# EAGLE board bird_beaks (EAGLE 9.6.2)
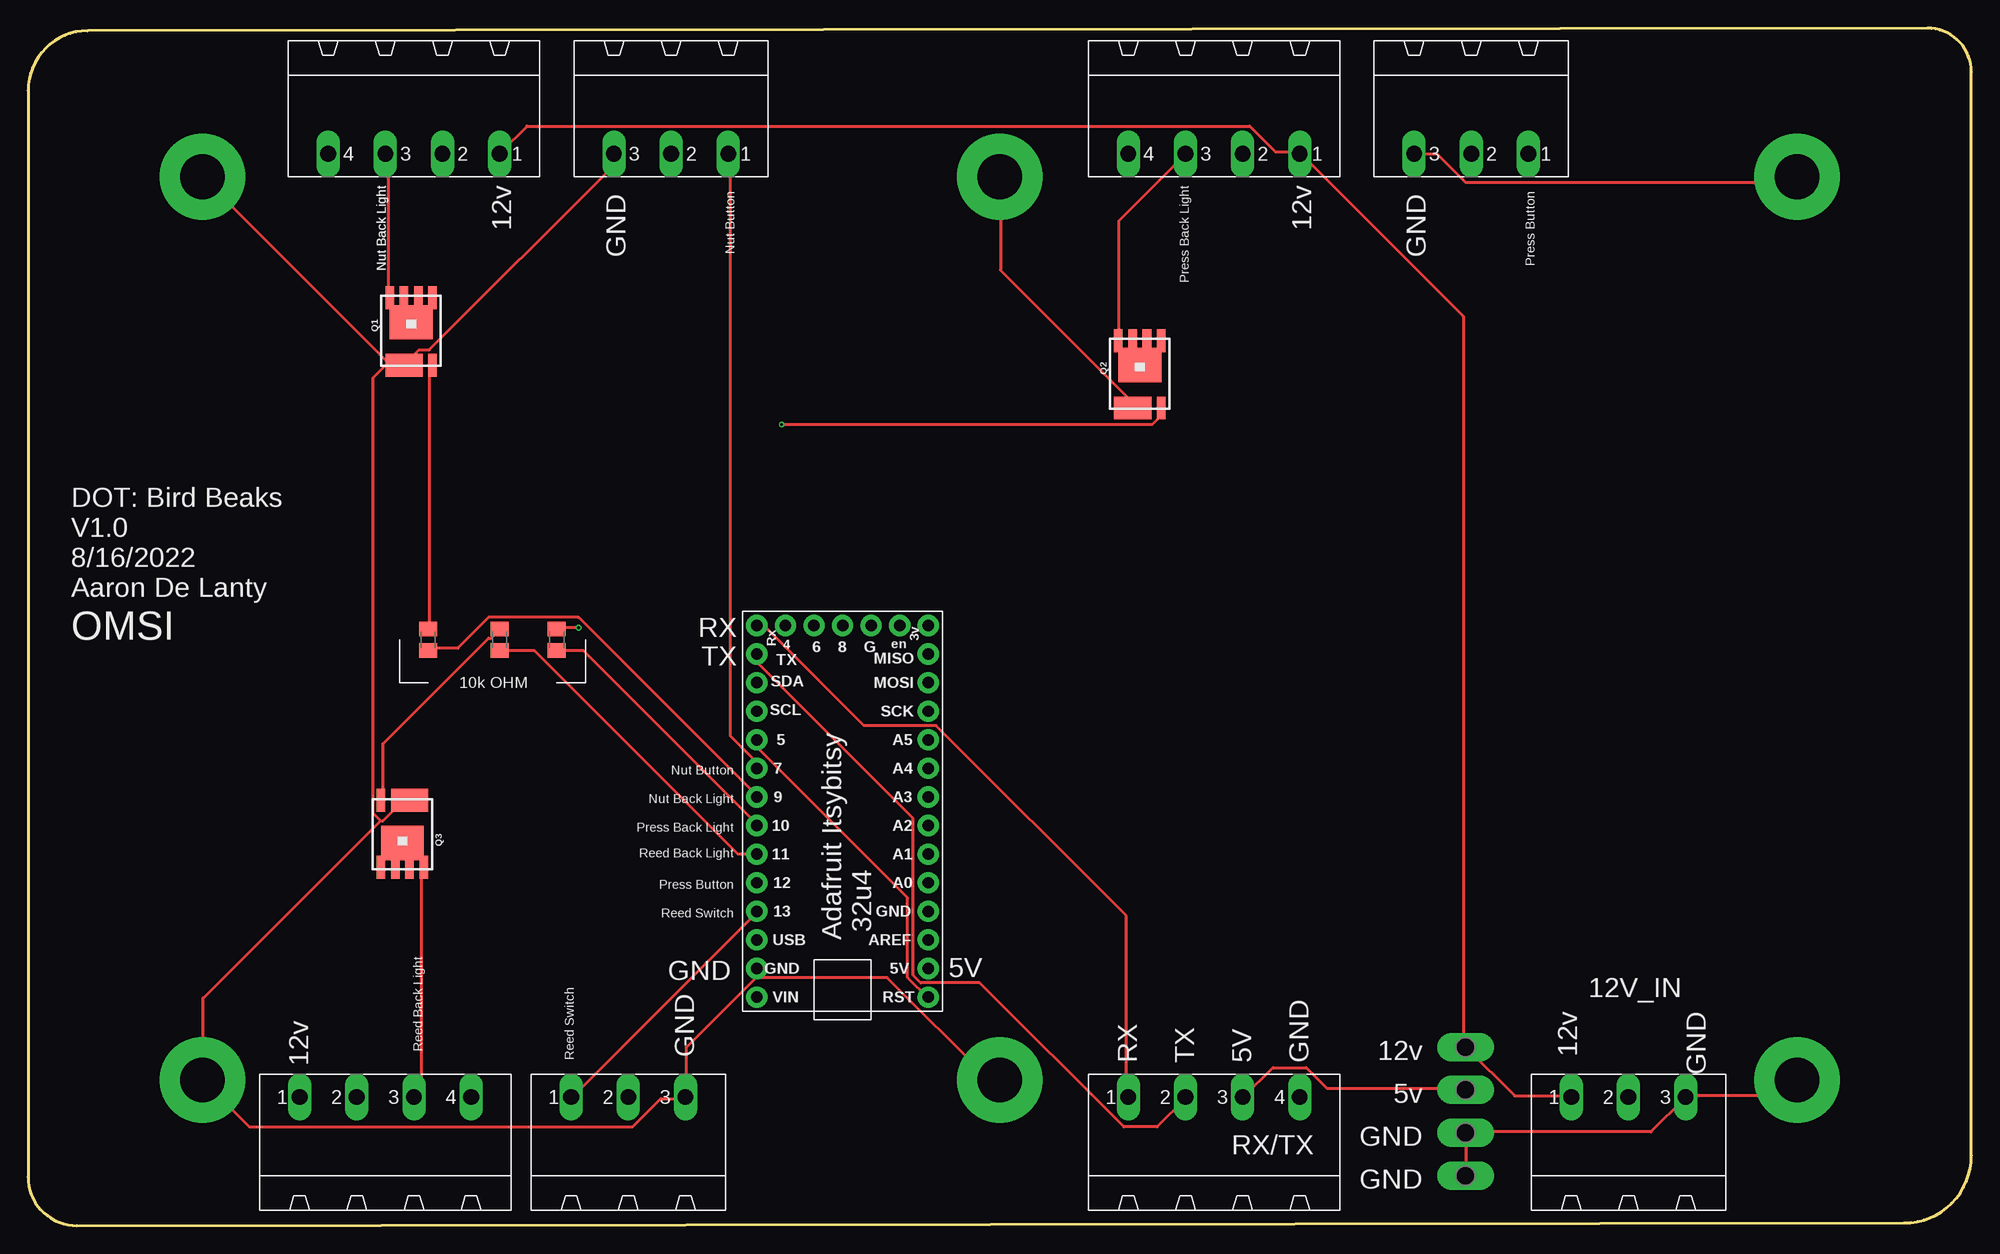
[diagram p0: board, top side]
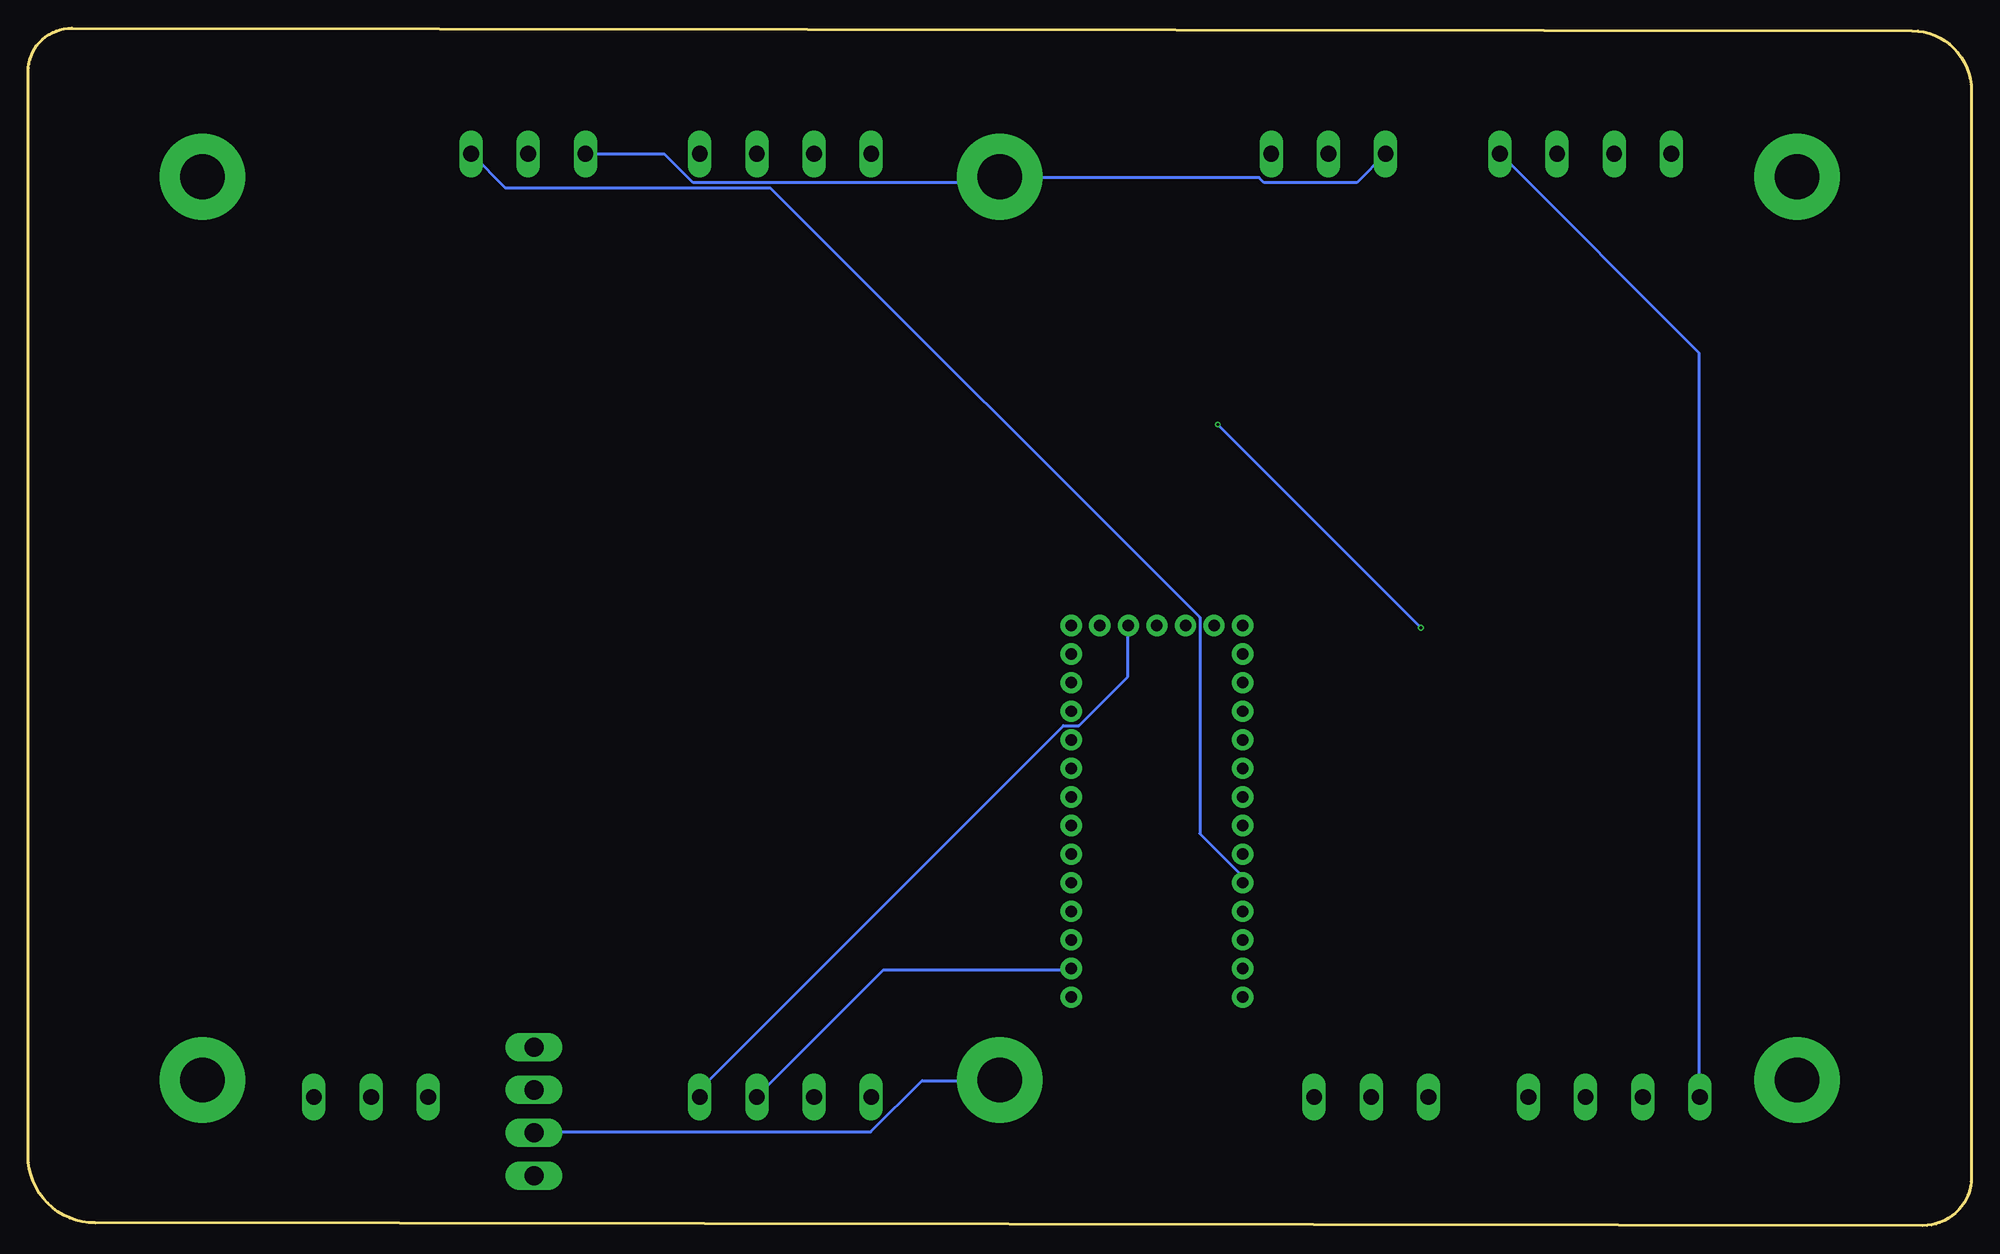
[diagram p1: board, bottom side, seen from below]

Size 172.72 x 106.41 mm. Coordinates in mm from the lower left corner, seen from the top.
Outline: 168.83,106.41 5.28,106.17 arc90 0,100.89 0,4.33 arc90 4.33,0 166.75,0.24 arc90 172.72,6.22 172.72,102.53 arc90 168.83,106.41
Copper layers (1*16): Top 0.035559375mm / dielectric 1.6mm / Bottom 0.035559375mm
Design rules "oshpark-2layer (1) *": minimum track width 10mil, minimum drill 10mil, track to track 8mil, track to pad 8mil, pad to pad 8mil, via to via 8mil, smd to smd 8mil, copper to edge 15mil, drill to drill 6mil, minimum pad ring 5mil, minimum via ring 5mil, stop-mask expansion 2.5mil, vias tented up to drill 25mil, thermal gap 10mil

## Footprints (pad centres in the part's own frame; a part is rotated, then mirrored left to right if it is on the bottom)
M0805 = smd 1.3 x 1.6: 1 -0.95,0; 2 0.95,0
MSTBA3 = drill 1.397 long: 1 -5.08,5.08; 2 0,5.08; 3 5.08,5.08
SO-8_POWER_PAK = smd 0.762 x 2.032: D1 -3.423,2.437; D2 -2.153,2.437; D3 -0.883,2.437; D4 0.387,2.437; G 0.387,-3.532 | smd 3.81 x 3.048: D5 -1.518,0.278 | smd 3.302 x 2.032: S -2.153,-3.532
MSTBA4 = drill 1.397 long: 1 -7.62,5.08; 2 -2.54,5.08; 3 2.54,5.08; 4 7.62,5.08
STANDOFF_ELECTRICAL_5_32 = drill 3.969 pad 7.62: P1 0,0
P2-38-17 = drill 1.702 pad 2.121 long: TP-1 -1.905,0; TP-2 1.905,0
ADAFRUIT_LENOARDO = drill 1.016 pad 1.88: 3V -10.16,-21.59; 5V -10.16,8.89; A0 -10.16,1.27; A1 -10.16,-1.27; A2 -10.16,-3.81; A3 -10.16,-6.35; A4 -10.16,-8.89; A5 -10.16,-11.43; AREF -10.16,6.35; D4 2.54,-21.59; D5 5.08,-11.43; D6 0,-21.59; D7 5.08,-8.89; D8 -2.54,-21.59; D9 5.08,-6.35; D10 5.08,-3.81; D11 5.08,-1.27; D12 5.08,1.27; D13 5.08,3.81; EN -7.62,-21.59; GND@0 -10.16,3.81; GND@1 -5.08,-21.59; GND@2 5.08,8.89; MISO -10.16,-19.05; MOSI -10.16,-16.51; RES -10.16,11.43; RX 5.08,-21.59; SCK -10.16,-13.97; SCL 5.08,-13.97; SDA 5.08,-16.51; TX 5.08,-19.05; USB 5.08,6.35; VIN 5.08,11.43

## Placement (x,y rotation side)
10K  [M0805]  35.56,52.06 270 top
10K1  [M0805]  46.99,52.06 270 top
10K2  [M0805]  41.91,52.06 270 top
12V_IN  MSTBA3  [MSTBA3]  142.24,6.34 0 top
Q1  MOSFET-NCH  [SO-8_POWER_PAK]  35.56,80 0 top
Q2  MOSFET-NCH  [SO-8_POWER_PAK]  100.33,76.19 0 top
Q3  MOSFET-NCH  [SO-8_POWER_PAK]  31.75,34.28 180 top
RX/TX  MSTBA4  [MSTBA4]  105.41,6.34 0 top
S1  STANDOFF_ELECTRICAL5-32  [STANDOFF_ELECTRICAL_5_32]  15.49,93.21 0 top
S2  STANDOFF_ELECTRICAL5-32  [STANDOFF_ELECTRICAL_5_32]  86.36,93.21 0 top
S3  STANDOFF_ELECTRICAL5-32  [STANDOFF_ELECTRICAL_5_32]  157.23,12.95 0 top
S4  STANDOFF_ELECTRICAL5-32  [STANDOFF_ELECTRICAL_5_32]  157.23,93.21 0 top
S6  STANDOFF_ELECTRICAL5-32  [STANDOFF_ELECTRICAL_5_32]  86.36,12.95 0 top
S8  STANDOFF_ELECTRICAL5-32  [STANDOFF_ELECTRICAL_5_32]  15.49,12.95 0 top
TP1  PTR2  [P2-38-17]  127.76,6.34 90 top
TP2  PTR2  [P2-38-17]  127.76,13.96 90 top
U1  ITSYBITSY_5V  [ADAFRUIT_LENOARDO]  69.85,31.74 180 top
X1  MSTBA4  [MSTBA4]  34.29,100.32 180 top
X2  MSTBA4  [MSTBA4]  105.41,100.32 180 top
X3  MSTBA4  [MSTBA4]  31.75,6.34 0 top
X4  MSTBA3  [MSTBA3]  57.15,100.32 180 top
X5  MSTBA3  [MSTBA3]  128.27,100.32 180 top
X6  MSTBA3  [MSTBA3]  53.34,6.34 0 top

## Library data of the parts
10K 10K1 10K2 = adafruit
12V_IN X4-X6 = con-phoenix-508; MF: FARNELL; MPN: 1757255; OC_FARNELL: 3705183; OC_NEWARK: 71C4162
Q1-Q3 U1 = th_ds_libraries
RX/TX = th_libraries; MF: FARNELL; MPN: 1757268; OC_FARNELL: 3705195; OC_NEWARK: 71C4163
S1-S4 S6 S8 = th_libraries
TP1 TP2 = testpad
X1-X3 = con-phoenix-508; MF: FARNELL; MPN: 1757268; OC_FARNELL: 3705195; OC_NEWARK: 71C4163

## Nets
5V: RX/TX.3 TP2.TP-1 U1.5V
12V: 12V_IN.1 TP2.TP-2 X1.1 X2.1 X3.1
D7: U1.D7 X4.1
D9: 10K.2 U1.D9
D10: 10K1.2 U1.D10
D11: 10K2.2 U1.D11
D12: U1.D12 X5.1
D13: U1.D13 X6.1
GND: 12V_IN.3 Q1.S Q2.S Q3.S S1.P1 S2.P1 S3.P1 S4.P1 S6.P1 S8.P1 TP1.TP-1 TP1.TP-2 U1.GND@2 X4.3 X5.3 X6.3
N$1: 10K2.1 Q3.G
N$2: 10K.1 Q1.G
N$3: U1.D5 U1.RES
N$5: Q1.D1 X1.3
N$7: 10K1.1 Q2.G
N$8: RX/TX.2 U1.TX
N$9: Q2.D1 X2.3
N$10: RX/TX.4 U1.GND@1
N$11: RX/TX.1 U1.RX
N$12: Q3.D1 X3.3

## Tracks (layer width: path | path; a pad name or v marks a point on that pad's centre or on a via)
5V
  Top 0.254: TP2.TP-1 127.56,12.21 115.44,12.21 113.61,14.04 110.64,14.04 108.13,11.53 RX/TX.3
  Bottom 0.254: U1.5V 80.01,22.73 96.7,22.73 107.9,11.53 RX/TX.3
12V
  Top 0.254: 12V_IN.1 137.16,11.53 132.13,11.53 127.79,15.87 TP2.TP-2 127.56,15.87 127.56,80.79 113.16,95.19 X2.1 112.93,95.42 110.87,95.42 108.59,97.71 44.35,97.71 42.06,95.42 X1.1
  Bottom 0.254: X3.1 24.23,11.53 24.23,77.59 41.83,95.19 X1.1
D7
  Top 0.254: U1.D7 64.69,40.79 64.69,41.24 62.41,43.53 62.41,95.19 X4.1
D9
  Top 0.254: 10K.2 35.66,51.3 38.18,51.3 40.92,54.04 48.92,54.04 64.69,38.27 U1.D9
D10
  Top 0.254: 10K1.2 47.09,51.07 49.38,51.07 64.69,35.76 U1.D10
D11
  Top 0.254: U1.D11 63.09,33.01 45.03,51.07 42.06,51.07 10K2.2
D12
  Bottom 0.254: U1.D12 64.92,30.5 64.92,31.18 68.58,34.84 68.58,54.04 106.76,92.22 130.3,92.22 133.27,95.19 X5.1
D13
  Top 0.254: U1.D13 64.69,27.76 48.46,11.53 X6.1
GND
  Top 0.254: 64.69,22.04 64.69,22.73 U1.GND@2 64.69,22.04 | 64.69,22.04 58.52,15.87 58.52,11.53 X6.3 58.29,11.3 56.24,11.3 53.72,8.78 19.66,8.78 S8.P1 15.54,13.13 15.54,20.21 31.32,35.99 | 64.69,22.04 76.35,22.04 85.27,13.13 86.18,13.13 S6.P1 | TP1.TP-1 127.79,4.44 127.79,8.1 TP1.TP-2 127.79,8.32 144.25,8.32 147.22,11.3 12V_IN.3 147.45,11.53 155.68,11.53 157.05,12.9 S3.P1 | X5.3 123.22,95.19 125.27,95.19 127.79,92.68 156.59,92.68 157.05,93.14 S4.P1 | 31.32,35.99 31.55,35.99 33.38,37.81 33.83,37.81 Q3.S | Q2.S 98.07,72.79 98.07,73.25 86.41,84.91 86.41,93.14 S2.P1 | 32,76.68 33.38,76.68 Q1.S | 32,76.68 15.54,93.14 S1.P1 | X4.3 51.89,95.19 51.89,94.05 35.66,77.82 34.75,77.82 33.6,76.68 Q1.S | 31.32,35.99 30.63,36.67 30.63,75.3 32,76.68 | 32,76.68 Q1.S
  Bottom 0.254: S6.P1 86.41,12.9 93.27,12.9 97.84,8.32 127.56,8.32 TP1.TP-2 | X4.3 54.63,92.68 62.87,92.68 63.32,93.14 86.18,93.14 S2.P1 86.41,93.14 86.87,92.68 113.61,92.68 116.13,95.19 122.99,95.19 X5.3
N$1
  Top 0.254: 10K2.1 41.83,52.9 41.15,52.22 40.92,52.22 31.55,42.84 31.55,38.04 Q3.G
N$2
  Top 0.254: 10K.1 35.66,53.13 35.66,76.22 35.89,76.45 Q1.G
N$3
  Top 0.254: U1.D5 64.92,43.07 64.92,42.39 78.18,29.13 78.18,22.04 80.01,20.21 U1.RES
N$5
  Top 0.254: Q1.D1 32,82.62 32,94.96 31.77,95.19 X1.3
N$7  (via drill 0.25)
  Top 0.254: v48.92,53.13 47.09,53.13 10K1.1 | v66.98,71.19 99.9,71.19 100.58,71.88 100.58,72.56 Q2.G
  Bottom 0.254: v66.98,71.19 v48.92,53.13
N$8
  Top 0.254: U1.TX 64.92,50.62 64.92,49.93 78.64,36.21 78.64,22.27 79.32,21.58 84.58,21.58 97.38,8.78 100.35,8.78 102.87,11.3 RX/TX.2
N$9
  Top 0.254: Q2.D1 96.93,78.73 96.93,89.25 102.87,95.19 X2.3
N$10
  Bottom 0.254: U1.GND@1 74.98,53.13 74.98,48.79 79.32,44.44 80.7,44.44 112.93,12.21 112.93,11.53 RX/TX.4
N$11
  Top 0.254: U1.RX 64.92,53.13 65.61,53.13 74.3,44.44 80.7,44.44 97.61,27.53 97.61,11.53 RX/TX.1
N$12
  Top 0.254: Q3.D1 34.98,31.64 34.98,12.21 34.29,11.53 X3.3

## Text on the board
tPlace: Adafruit Itsybitsy / 32u4
tNames: Nut Back Light | Nut Back Light | 12v | Press Back Light | 12v | GND | Nut Button | GND | Press Button | DOT: Bird Beaks / V1.0 / 8/16/2022 / Aaron De Lanty | RX | OMSI | TX | 10k OHM | Nut Button | Nut Back Light | Press Back Light | Reed Back Light | Press Button | Reed Switch | GND | 5V | 12v | GND | 12v | Reed Back Light | Reed Switch | GND | RX | TX | 5V | GND | 12v | 5v | GND | GND